# Altium PCB EEG_PCB.PcbDoc (part 2 of 2)
Units mm, origin at the board's own origin, x right, y up, seen from the top; angles counter-clockwise.
Board outline 44 x 34 mm, 4 copper layers (Top Layer, Internal Plane 1, Internal Plane 2, Bottom Layer), stack 0.778 mm thick; 60 components, 61 nets, 284 pads, 106 vias.
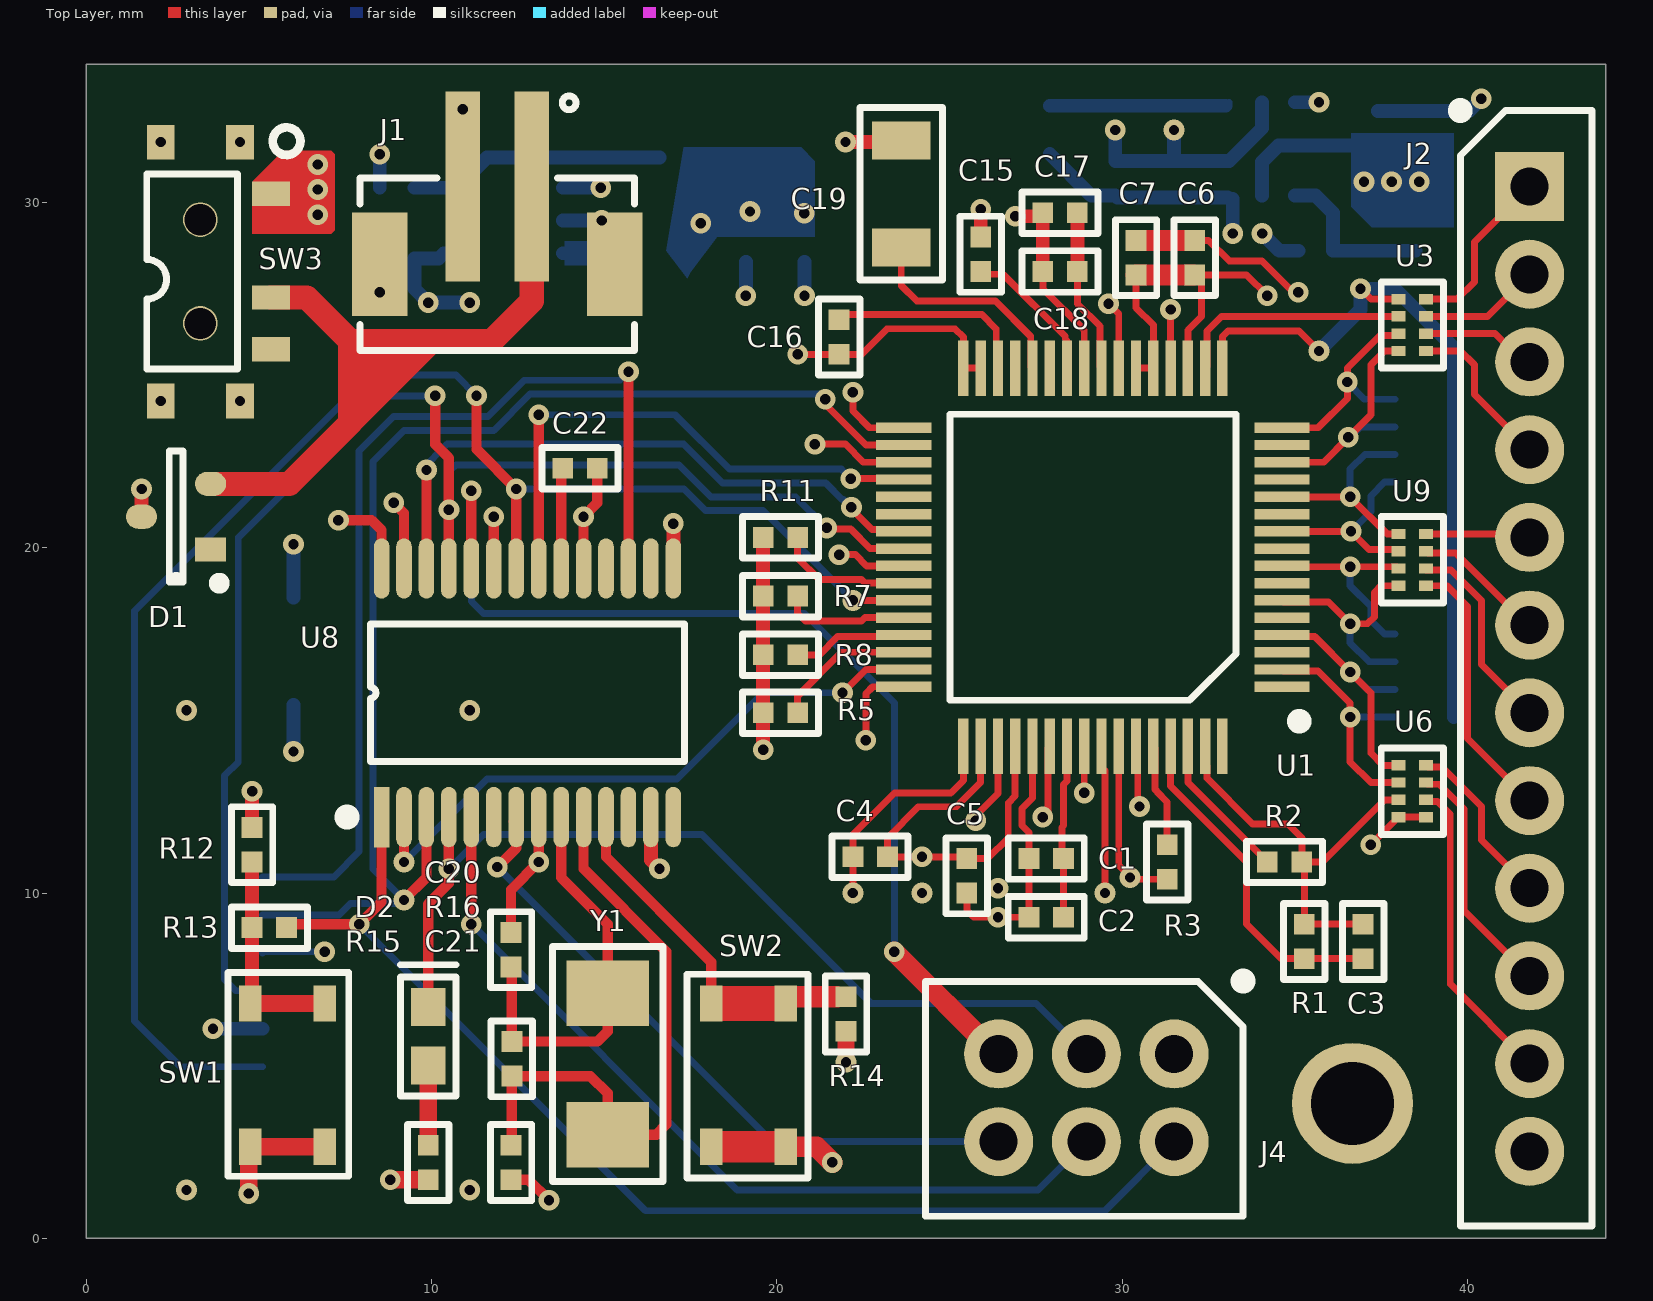
[diagram p0: Top Layer view]

## Part data (continued)
U1: library part ADS1299IPAGR, "IC AFE 24BIT 16KSPS LN 64TQFP", Case/Package=TQFP, Manufacturer="Texas Instruments", Max Operating Temperature=85°C, Max Power Dissipation=42mW, Max Supply Voltage=5.25V, Min Operating Temperature=-40°C, Operating Supply Current=7.14mA, Package Quantity=1, Power Consumption=41mW, Supplier Part Number 1=296-34818-6-ND, Category="Data Acquisition - Analog Front End (AFE)", ComponentLink1Description=http://www.ti.com/lit/ds/symlink/ads1299.pdf?src-supplier=Digi-Key, ComponentLink1URL=http://www.ti.com/lit/ds/symlink/ads1299.pdf?src-supplier=Digi-Key, ComponentLink2Description=http://www.ti.com/general/docs/lit/getliterature.tsp?genericPartNumber=ADS1299&&fileType=pdf&src-supplier=Avnet, ComponentLink2URL=http://www.ti.com/general/docs/lit/getliterature.tsp?genericPartNumber=ADS1299&&fileType=pdf&src-supplier=Avnet, ComponentLink3Description=https://www.verical.com/server-webapp/html/getDatasheet?partID=681922&src-supplier=Verical, ComponentLink3URL=https://www.verical.com/server-webapp/html/getDatasheet?partID=681922&src-supplier=Verical, ComponentLink4Description=http://www.ti.com/litv/sbas499a?src-supplier=Mouser, ComponentLink4URL=http://www.ti.com/litv/sbas499a?src-supplier=Mouser, ComponentLink5Description=http://www.produktinfo.conrad.com/datenblaetter/1100000-1199999/001186463-da-01-en-IC_AFE_24BIT_16_ADS1299IPAGR_TQFP_64_TID.pdf?src-supplier=Conrad, ComponentLink5URL=http://www.produktinfo.conrad.com/datenblaetter/1100000-1199999/001186463-da-01-en-IC_AFE_24BIT_16_ADS1299IPAGR_TQFP_64_TID.pdf?src-supplier=Conrad, Contact Plating=Gold, Conversion Rate=16KS/s, Interface=SPI, Lead Free="Lead Free", Manufacturer Part Number=ADS1299IPAGR, Number of A/D Converters=8, Number of Bits=24, Number of Channels=8, Number of Converters=8, Number of Inputs=8, Number of Pins=64, Packaging="Tape and Reel", Pricing 1="1=53.84, 10=50.577, 100=44.051 (USD)", Radiation Hardening=No, Resolution=24b, Sampling Rate=16KS/s, Signal to Noise Ratio (SNR)=121dB, Stock 1=1589, Supplier 1=Digi-Key, Type="General Purpose"
U2: library part AP3417CKTR-G1, "IC REG BUCK ADJ 1A SYNC SOT25", Case/Package=SOT-23-5, Manufacturer=Diodes, Max Input Voltage=5.5V, Max Operating Temperature=85°C, Max Output Current=1A, Max Output Voltage=4.95V, Min Input Voltage=2.5V, Min Operating Temperature=-40°C, Min Output Voltage=600mV, Operating Supply Current=220uA, Output Voltage=5V, Package Quantity=3000, Supplier Part Number 1=AP3417CKTR-G1DIDKR-ND, Switching Frequency=1.5MHz, ComponentLink1Description=https://www.diodes.com/assets/Datasheets/AP3417C.pdf?src-supplier=Digi-Key, ComponentLink1URL=https://www.diodes.com/assets/Datasheets/AP3417C.pdf?src-supplier=Digi-Key, ComponentLink2Description=http://www.diodes.com/datasheets/AP3417C.pdf?src-supplier=Avnet, ComponentLink2URL=http://www.diodes.com/datasheets/AP3417C.pdf?src-supplier=Avnet, Efficiency=94%, Height=1.3mm, Lead Free="Lead Free", Length=3.1mm, Manufacturer Part Number=AP3417CKTR-G1, Min Supply Voltage=2.5V, Mount="Surface Mount", Number of Outputs=1, Number of Pins=5, Operating Supply Voltage=5.5V, Output Configuration=Positive, Output Current=1A, Output Type=Adjustable, Packaging="Tape and Reel", Pricing 1="1=0.41, 10=0.351, 100=0.2621, 500=0.20592, 1000=0.15912 (USD)", Stock 1=30373, Supplier 1=Digi-Key, Synchronous Rectifier=Yes, Weight=0.001058oz, Width=1.7mm
U3 U6 U9: library part EXB-N8V162JX, Case/Package=0402, Manufacturer=Panasonic, Max Operating Temperature=125°C, Min Operating Temperature=-55°C, Number of Resistors=4, Package Quantity=1, Power Per Element=31mW, Resistance=1.6kR, Supplier Part Number 1=Y10162DKR-ND, Temperature Coefficient=200ppm/°C, Tolerance=5%, Voltage Rating=50V, Voltage Rating (DC)=100V, Circuit Type=Isolated, ComponentLink1Description=http://www.mouser.com/ds/2/315/AOC0000CE1-49292.pdf?src-supplier=Mouser, ComponentLink1URL=http://www.mouser.com/ds/2/315/AOC0000CE1-49292.pdf?src-supplier=Mouser, ComponentLink2Description=http://industrial.panasonic.com/www-data/pdf/AOC0000/AOC0000CE1.pdf?src-supplier=Avnet, ComponentLink2URL=http://industrial.panasonic.com/www-data/pdf/AOC0000/AOC0000CE1.pdf?src-supplier=Avnet, ComponentLink3Description=http://www.onlinecomponents.com/datasheet/exb-n8v162jx.aspx?p=44463680&src-supplier=Onlinecomponents.com, ComponentLink3URL=http://www.onlinecomponents.com/datasheet/exb-n8v162jx.aspx?p=44463680&src-supplier=Onlinecomponents.com, ComponentLink4Description=https://industrial.panasonic.com/cdbs/www-data/pdf/AOC0000/AOC0000C14.pdf?src-supplier=Digi-Key, ComponentLink4URL=https://industrial.panasonic.com/cdbs/www-data/pdf/AOC0000/AOC0000C14.pdf?src-supplier=Digi-Key, Height=0.022inch, Lead Free="Contains Lead", Length=0.079inch, Manufacturer Part Number=EXB-N8V162JX, Mount="Surface Mount", Number of Contacts=8, Number of Pins=8, Number of Terminals=8, Packaging="Tape and Reel", Pricing 1="1=0.11, 10=0.094, 25=0.0652, 50=0.0508, 100=0.0363, 250=0.02832, 500=0.0225, 1000=0.01597, 5000=0.01234 (USD)", Radiation Hardening=No, Stock 1=21369, Supplier 1=Digi-Key, Terminal Pitch=0.5mm, Termination=SMD/SMT, Width=1mm
U4: library part TPS61073DDCR, "IC REG BOOST ADJ 0.5A SYNC SOT6", Case/Package=SOT-23-6, Frequency=1.2MHz, Manufacturer="Texas Instruments", Max Input Voltage=5.5V, Max Operating Temperature=85°C, Max Output Current=150mA, Min Input Voltage=900mV, Min Operating Temperature=-40°C, Min Output Voltage=2.3V, Package Quantity=1, Quiescent Current=19uA, Supplier Part Number 1=296-21898-2-ND, Category="PMIC - Voltage Regulators - DC DC Switching Regulators", ComponentLink1Description=http://focus.ti.com/lit/ds/symlink/tps61070.pdf?src-supplier=Element14, ComponentLink1URL=http://focus.ti.com/lit/ds/symlink/tps61070.pdf?src-supplier=Element14, ComponentLink2Description=http://www.ti.com/lit/ds/symlink/tps61073.pdf?src-supplier=Digi-Key, ComponentLink2URL=http://www.ti.com/lit/ds/symlink/tps61073.pdf?src-supplier=Digi-Key, Efficiency=90%, Lead Free="Lead Free", Manufacturer Part Number=TPS61073DDCR, Max Output Voltage=5.5V, Max Supply Voltage=5.5V, Min Supply Voltage=2.3V, Mount="Surface Mount", Number of Outputs=1, Number of Pins=6, Output Configuration=Positive, Output Current=150mA, Output Type=Adjustable, Output Voltage=5.5V, Packaging="Tape and Reel", Pricing 1="3000=0.52668, 6000=0.50688, 15000=0.49104 (USD)", REACH SVHC="No SVHC", Stock 1=6000, Supplier 1=Digi-Key, Switching Frequency=1.2MHz, Synchronous Rectifier=Yes, Termination=SMD/SMT, Topology=Boost, Weight=0.00127oz
U5 U7: library part CA0612KRX7R9BB102, "YAGEO (PHYCOMP)         CA0612KRX7R9BB102             Capacitor Array, C-Array, 1000 pF, 50 V,  10%, SMD, 4 Element", Capacitance=1nF, Case/Package=0612, Case Code (Metric)=1632, Dielectric=X7R, Dielectric Material=Ceramic, Insulation Resistance=10GR, Manufacturer=Yageo, Max Operating Temperature=125°C, Min Operating Temperature=-55°C, Number of Capacitors=4, Package Quantity=4000, Supplier Part Number 1=311-2073-6-ND, Tolerance=10%, Voltage=50V, Case Code (Imperial)=0612, Circuit Type=Isolated, ComponentLink1Description=https://www.verical.com/server-webapp/html/getDatasheet?partID=403419&src-supplier=Verical, ComponentLink1URL=https://www.verical.com/server-webapp/html/getDatasheet?partID=403419&src-supplier=Verical, ComponentLink2Description=http://www.yageo.com/documents/recent/UPY-4C-Array_16V-to-50V-3.pdf?src-supplier=Digi-Key, ComponentLink2URL=http://www.yageo.com/documents/recent/UPY-4C-Array_16V-to-50V-3.pdf?src-supplier=Digi-Key, ComponentLink3Description=http://www.farnell.com/datasheets/2167451.pdf?src-supplier=Element14, ComponentLink3URL=http://www.farnell.com/datasheets/2167451.pdf?src-supplier=Element14, ComponentLink4Description=http://www.yageo.com/documents/recent/UPY-4C-Array_16V-to-50V_4.pdf?src-supplier=Future+Electronics, ComponentLink4URL=http://www.yageo.com/documents/recent/UPY-4C-Array_16V-to-50V_4.pdf?src-supplier=Future+Electronics, Composition=Ceramic, Depth=3.2mm, Dissipation Factor=2.5%, Height=0.8mm, Height - Seated (Max)=0.035inch, Lead Free="Lead Free", Length=3.2mm, Manufacturer Part Number=CA0612KRX7R9BB102, Mount="Surface Mount", Number of Elements=4, Number of Terminals=8, Packaging="Tape and Reel", Pricing 1="1=0.41, 10=0.283, 100=0.1697, 500=0.12728, 1000=0.10749 (USD)", Radiation Hardening=No, REACH SVHC=Unknown, Stock 1=2369, Supplier 1=Digi-Key, Terminal Pitch=0.8mm, Termination=SMD/SMT, Voltage Rating=50V, Width=0.063inch
U8: library part PIC32MX250F128B-I/SS, "MICROCHIP - PIC32MX250F128B-I/SS - MCU, 32BIT, PIC32, 40MHZ, SSOP-28", Case/Package=SSOP, Frequency=40MHz, Manufacturer=Microchip, Max Operating Temperature=85°C, Max Supply Voltage=3.6V, Min Operating Temperature=-40°C, Min Supply Voltage=2.3V, Package Quantity=47, Supplier Part Number 1=PIC32MX250F128B-I/SS-ND, Address Bus Width=32b, ComponentLink1Description=https://www.distrelec.biz/Web/Downloads/_t/ds/PIC32MX1XX_2XX_eng_tds.pdf?mime=application%2Fpdf&src-supplier=Distrelec, ComponentLink1URL=https://www.distrelec.biz/Web/Downloads/_t/ds/PIC32MX1XX_2XX_eng_tds.pdf?mime=application%2Fpdf&src-supplier=Distrelec, ComponentLink2Description=http://uk.rs-online.com/webdocs/1385/0900766b8138557c.pdf?src-supplier=RSComponents, ComponentLink2URL=http://uk.rs-online.com/webdocs/1385/0900766b8138557c.pdf?src-supplier=RSComponents, ComponentLink3Description=http://www.microchip.com/mymicrochip/filehandler.aspx?ddocname=en556114&src-supplier=Digi-Key, ComponentLink3URL=http://www.microchip.com/mymicrochip/filehandler.aspx?ddocname=en556114&src-supplier=Digi-Key, ComponentLink4Description=http://ww1.microchip.com/downloads/en/DeviceDoc/61168D.pdf?src-supplier=Avnet, ComponentLink4URL=http://ww1.microchip.com/downloads/en/DeviceDoc/61168D.pdf?src-supplier=Avnet, ComponentLink5Description=http://www.farnell.com/datasheets/1538023.pdf?src-supplier=Element14, ComponentLink5URL=http://www.farnell.com/datasheets/1538023.pdf?src-supplier=Element14, Core Architecture=PIC, Data Bus Width=32b, Height=1.85mm, Interface=I2C,SPI,USB,IrDA,UART,USART,LIN,I2S, Lead Free="Lead Free", Length=10.5mm, Manufacturer Part Number=PIC32MX250F128B-I/SS, Max Frequency=40MHz, Memory Size=128KB, Memory Type=FLASH, Number of ADC Channels=10, Number of I2C Channels=2, Number of I/Os=19, Number of Pins=28, Number of Programmable I/O=19, Number of PWM Channels=5, Number of SPI Channels=2, Number of Timers/Counters=5, Number of UART Channels=2, Oscillator Type=Internal, Packaging=Rail/Tube, Peripherals="I2C,Brown-out Detect/Reset,POR,PWM,WDT,DMA", Pricing 1="1=3.57, 25=3.27, 100=2.96 (USD)", Radiation Hardening=No, RAM Size=32KB, REACH SVHC="No SVHC", Stock 1=861, Supplier 1=Digi-Key, Watchdog Timer=Yes, Width=5.6mm
Y1: "Crystal Oscillator", Case/Package=SMD/SMT, ESR (Equivalent Series Resistance)=100R, Frequency=8MHz, Frequency Stability=30ppm, Frequency Tolerance=20ppm, Load Capacitance=18pF, Manufacturer="ECS International", Manufacturer Part Number=ECS-80-18-30-JGN-TR, Max Operating Temperature=85°C, Min Operating Temperature=-40°C, Supplier Part Number 1=XC2103DKR-ND, ComponentLink1Description=http://www.mouser.com/ds/2/122/ecx-53r-17605.pdf?src-supplier=Mouser, ComponentLink1URL=http://www.mouser.com/ds/2/122/ecx-53r-17605.pdf?src-supplier=Mouser, ComponentLink2Description=http://www.ecsxtal.com/store/pdf/partnumber4.pdf?src-supplier=Digi-Key, ComponentLink2URL=http://www.ecsxtal.com/store/pdf/partnumber4.pdf?src-supplier=Digi-Key, ComponentLink3Description=http://www.ecsxtal.com/store/pdf/ecx-53r.pdf?src-supplier=Digi-Key, ComponentLink3URL=http://www.ecsxtal.com/store/pdf/ecx-53r.pdf?src-supplier=Digi-Key, Height=0.055inch, LatestRevisionDate=17-Jul-2002, LatestRevisionNote="Re-released for DXP Platform.", Length=0.197inch, Mount="Surface Mount", PackageDescription="Crystal, Thru-Hole; 2 Leads; Body 3.1 x 8.2 mm (Dia.xH)", PackageReference=R38, Packaging="Tape and Reel", Pricing 1="1=0.69, 10=0.607, 50=0.5676, 100=0.5016, 500=0.4752 (USD)", Published=8-Jun-2000, Publisher="Altium Limited", Stock 1=5339, Supplier 1=Digi-Key, Width=0.126inch

## Free pads (board coordinates)
  round 3.5 hole 2.4: 1(36.67,3.91)

## Via types
v1: diameter 0.6, hole 0.3, Top Layer to Bottom Layer, tented both sides, 106 vias

## Nets (pads, with @x,y where several pads share a name; then routed paths per layer and width w, separated by ;. In a path a pad name is that pad's centre, name@x,y a point inside that pad or via, vN(x,y) a via of type N, cw(c..) or ccw(c..) an arc to the next point about the centre after c; other vN are vias at no path point)
1P: J2.3 U3.6 | length 3.3
  Top Layer w0.2: U3.6 40.8,26.2 41.2,25.8 41.38,25.8 J2.3
2P: J2.4 U3.5 | length 4.7
  Top Layer w0.2: U3.5 39.8,25.7 40.2,25.3 40.2,24.44 J2.4
3P: J2.5 U9.8 | length 3
  Top Layer w0.2: U9.8 41.7,20.4 J2.5
3V3: C4.2 C5.2 C9.2 C10.2 C23.2 J3.4 J4.1 L1.2 R4.2 R12.2 SW2.1 SW2.2 U1.35 U1.48 U1.50 U1.52 U8.13 U8.15 U8.23 U8.28 | length 29.6
  Top Layer w0.2: v1(21.1,23) 21.986,23 22.511,22.475 U1.35 ; v1(22.575,14.425) 22.575,15.775 22.775,15.975 U1.48 ; U1.50 25.9,13.2 25.2,12.5 24.1,12.5 23.2,11.6 C4.2 v1(24.2,11.05) 25.45,11.05 C5.2 26.1,11 26.7,11.6 26.7,12.614 26.9,12.814 U1.52
  Top Layer w0.3: v1(7.3,20.8) 8.26,20.8 8.55,20.51 U8.28 ; U8.23 v1(11.8,20.9)
  Top Layer w0.4: R12.2 v1(4.8,12.95) ; U8.13 16.35,10.95 v1(16.6,10.7) ; U8.15 v1(17,20.7)
  Top Layer w0.6: SW2.2 21.15,2.65 v1(21.6,2.2)
  Bottom Layer w0.2: J3.4 5.13,8.3 v1(6.9,8.3)
  Bottom Layer w0.4: C23.2 v1(6,20.1)
  other v1: 24.2,10 17.79,29.4 20.79,29.69 19.22,29.74
4P: J2.6 U9.7 | length 4.1
  Top Layer w0.2: U9.7 38.85,19.85 39.65,19.85 41.36,18.14 41.36,17.76 J2.6
5P: J2.7 U9.6 | length 5.8
  Top Layer w0.2: U9.6 38.8,19.35 39.525,19.35 40.4,18.475 40.4,16.62 J2.7
5V: C6.2 C7.2 C13.2 C14.2 R9.2 U1.19 U1.21 U1.22 U1.54 U1.56 U1.59 U4.5 | length 20
  Top Layer w0.2: v1(27.7,12.2) 27.85,12.35 27.85,14.2 U1.54 ; v1(28.9,12.9) 28.9,14.15 28.85,14.2 U1.56 ; U1.59 30.45,14.2 30.45,12.556 v1(30.5,12.506) ; U1.22 U1.21 30.9,26.45 30.4,26.95 C7.2 ; U1.19 31.9,26.3 32.3,26.7 32.3,27.9 33.6,27.9 v1(34.2,27.3) ; C6.2@32.06,27.9 32.08,27.92 C6.2
  Top Layer w0.6: C7.2 C6.2@32.06,27.9
  Bottom Layer w0.4: U4.5 34.05,31.173 34.523,31.646 C13.2
  other v1: 37,30.6 37.8,30.6 38.6,30.6
6P: J2.8 U9.5 | length 7.8
  Top Layer w0.2: U9.5 39.4,18.9 40,18.3 40,14.48 J2.8
7P: J2.9 U6.8 | length 5
  Top Layer w0.2: U6.8 38.85,13.65 39.256,13.65 40.4,12.506 40.4,11.54 J2.9
8P: J2.10 U6.7 | length 7
  Top Layer w0.2: U6.7 38.85,13.15 39.19,13.15 39.9,12.44 39.9,9.5 J2.10
/MCLR: J4.2 R13.1 U8.1 | length 33.5
  Top Layer w0.2: R13.1@5.7,9 R13.1@5.8,9.1
  Top Layer w0.3: R13.1@5.8,9.1 v1(7.9,9.1) 8.55,9.75 U8.1
  Bottom Layer w0.2: v1(7.9,9.1) 16.2,0.8 29.5,0.8 J4.2
ADS_GPIO_1: R11.2 U1.42 | length 4
  Top Layer w0.2: R11.2 20.6,19.7 21.225,19.075 22.449,19.075 22.549,18.975 U1.42
ADS_GPIO_2: R7.1 U1.44 | length 3.7
  Top Layer w0.2: R7.1 20.6,18.1 20.825,17.875 22.449,17.875 22.549,17.975 U1.44
ADS_GPIO_3: R8.1 U1.45 | length 3.3
  Top Layer w0.2: R8.1 21.234,16.9 21.759,17.425 23.625,17.425 U1.45
ADS_GPIO_4: R5.1 U1.46 | length 4.1
  Top Layer w0.2: R5.1 20.6,15.7 21.875,16.975 U1.46
ADS_VCAP1: C19.2 U1.28 | length 6.4
  Top Layer w0.2: C19.2 23.6,27.6 24.05,27.15 26.324,27.15 27.35,26.124 27.35,25.25 U1.28
ADS_VCAP2: C16.2 U1.30 | length 5.9
  Top Layer w0.2: C16.2 21.95,26.75 25.941,26.75 26.35,26.341 26.35,25.25 U1.30
ADS_VCAP3: C1.2 C2.2 U1.55 | length 5
  Top Layer w0.2: C2.2 C1.2 28.25,11.05 28.25,11.901 28.3,11.951 28.3,12.449 28.3,13.149 28.4,13.249 U1.55
ADS_VCAP4: C15.2 U1.26 | length 4.2
  Top Layer w0.2: C15.2 25.98,27.92 26.554,27.92 28.35,26.124 28.35,26.041 28.4,25.991 U1.26
ADS_VREFP: C17.1 C18.1 U1.24 | length 4.8
  Top Layer w0.2: C18.1 28.7,27.066 29.35,26.416 29.35,25.25 U1.24
  Top Layer w0.4: C18.1 C17.1
BIAS: J2.11 U6.6 | length 9
  Top Layer w0.2: U6.6 38.85,12.65 39.124,12.65 39.5,12.274 39.5,7.36 J2.11
BIAS_DRV: C3.2 R1.2 R2.2 U1.63 U6.3 | length 12.2
  Top Layer w0.2: U1.63 32.4,13.724 32.45,13.674 32.45,13.326 33.776,12 34.8,12 35.2,11.6 R2.2 ; C3.2 R1.2 35.275,10.825 R2.2 ; U6.3 37.6,12.7 35.8,10.9 R2.2
BIAS_IN: R2.1 U1.62 | length 4.3
  Top Layer w0.2: U1.62 31.9,13.2 R2.1
BIAS_INV: C3.1 R1.1 U1.61 | length 9.9
  Top Layer w0.2: U1.61 31.4,13.1 33.6,10.9 33.6,9.1 34.6,8.1 R1.1 C3.1
BIAS_REF: R3.1 U1.60 | length 3
  Top Layer w0.2: U1.60 30.95,14.2 30.95,12.999 31,12.949 31,12.934 31.3,12.634 R3.1
BOOST_FB: R9.1 R10.2 U4.4 | length 4.8
  Bottom Layer w0.4: U4.4 35.6,30.2 36.1,29.7 R10.2 R9.1
BOOST_SW: L2.2 U4.1 | length 5.2
  Bottom Layer w0.2: U4.1@33,32.8 U4.1
  Bottom Layer w0.4: L2.2 U4.1@33,32.8
BOOT_EN: R14.2 SW2.3 SW2.4 U8.11 | length 6.9
  Top Layer w0.2: R14.2@21.8,6.8 R14.2
  Top Layer w0.3: U8.11 15.05,11.05 18.1,8 SW2.4
BUCK_FB: R4.1 R6.2 U2.5 | length 7.7
  Bottom Layer w0.4: R6.2 U2.5 11.2,30.9 11.6,31.3 R4.1
BUCK_LX: L1.1 U2.3 | length 2.5
  Bottom Layer w0.2: U2.3 U2.3@13.95,28.377 ; L1.1@15.5,28.377 L1.1
  Bottom Layer w0.4: U2.3 14.8,28.527 15.15,28.177 L1.1
CS1: U1.39 U8.26 | length 18.4
  Top Layer w0.2: v1(22.156,21.175) 22.156,21.119 22.75,20.525 23.625,20.525 U1.39
  Top Layer w0.3: U8.26 v1(9.85,22.25)
  Bottom Layer w0.2: v1(9.85,22.25) 9.701,22.25 10.451,23 17.3,23 18.425,21.875 21.414,21.875 21.889,21.4 21.931,21.4 v1(22.156,21.175)
CS3: J3.2 U8.17 | length 29.2
  Top Layer w0.3: U8.17 v1(15.7,25.1)
  Bottom Layer w0.2: J3.2 7.17,10.47 7.9,11.2 7.9,22.8 8.9,23.8 11.634,23.8 12.686,24.851 15.451,24.851 v1(15.7,25.1)
DRDY: U1.47 U8.2 | length 18.1
  Top Layer w0.2: v1(21.9,15.8) 22.575,16.475 U1.47
  Top Layer w0.3: v1(9.2,10.9) U8.2
  Bottom Layer w0.2: v1(9.2,10.9) 11.6,13.3 17.1,13.3 19.6,15.8 v1(21.9,15.8)
GND: C1.1 C2.1 C4.1 C5.1 C6.1 C7.1 C8.1 C9.1 C10.1 C11.1 C12.1 C13.1 C14.1 C15.1 C16.1 C17.2 C18.2 C19.1 C20.1 C21.1 C22.1 C23.1 D1.3 J1.2 J1.3 J1.4 J2.12 J3.6 J3.9 J3.10 J3.11 J3.12 R3.2 R5.2 R6.1 R7.2 R8.2 R10.1 R11.1 R14.1 R15.1 SW1.3 SW1.4 SW3.4 SW3.5 SW3.6 SW3.7 U1.20 U1.23 U1.25 U1.31 U1.32 U1.33 U1.41 U1.49 U1.51 U1.53 U1.57 U1.58 U2.2 U4.2 U6.4 U6.5 U8.8 U8.19 U8.27 | length 98.4
  Top Layer w0.2: SW1.3@4.7,2.6 SW1.3 ; U8.27@9.075,19.525 U8.27 ; R15.1@9.8,1.6 R15.1 ; v1(20.6,25.6) C16.1 22.45,25.6 23.191,26.341 25.159,26.341 25.4,26.1 U1.32 U1.31 ; v1(21.8,19.8) 22.275,19.8 22.6,19.475 U1.41 ; v1(21.986,31.75) v1@22.036,31.8 ; v1(22.2,10) C4.1 22.2,11.7 23.4,12.9 25.034,12.9 25.4,13.266 U1.49 ; v1(22.2,24.5) 22.2,23.96 22.685,23.475 U1.33 ; C19.1@23.55,31.75 C19.1 ; C5.1 25.5,9.5 25.7,9.3 v1(26.4,9.3) C2.1 C1.1 27.3,11.751 27.1,11.952 27.1,12.449 27.4,12.749 U1.53 ; v1(25.76,12.1) 25.76,12.24 26.4,12.88 U1.51 U1.51@26.35,14.2 ; v1(26.9,29.6) v1@27,29.7 ; C17.2@27.6,29.6 C17.2 ; C18.2 27.7,27.5 28.9,26.3 U1.25 ; U1.57 29.4,13.65 29.5,13.55 v1(29.5,10) ; v1(29.6,27.066) 29.9,26.766 U1.23 U1.23@29.95,25.25 ; U1.58 29.9,10.8 30.225,10.475 v1(30.225,10.45) 30.275,10.4 R3.2 ; C7.1@30.4,28.92 C7.1@30.42,28.9 ; U1.20 v1(31.4,26.9) ; C6.1 32.5,28.9 33.1,28.3 34.049,28.3 34.949,27.4 v1(35.1,27.4) ; v1(37.2,11.4) U6.4 U6.5
  Top Layer w0.3: v1(8.9,21.3) 9.2,21 U8.27 ; C21.1 12.8,1.7 v1(13.4,1.1) ; C20.1 12.3,10.1 v1(13.1,10.9) U8.8 ; U8.19 v1(14.4,20.9) 14.8,21.3 C22.1
  Top Layer w0.4: D1.3 v1(1.6,21.7) ; v1(19.6,14.15) R5.2 R8.2 R7.2 R11.1 ; v1(21.986,31.75) C19.1@23.55,31.75 ; C15.1 v1(25.9,29.8) ; v1(26.9,29.6) C17.2@27.6,29.6 ; C18.2 C17.2
  Top Layer w0.5: v1(4.7,1.3) SW1.3@4.7,2.6 ; SW1.3 SW1.4 ; v1(8.8,1.7) R15.1@9.7,1.7 ; v1(22,5.1) R14.1
  Top Layer w0.6: C7.1@30.42,28.9 C6.1
  Bottom Layer w0.2: C12.1 C12.1@31.5,31.2
  Bottom Layer w0.4: v1(3.67,6.07) J3.6 ; v1(6,14.1) C23.1 ; v1(8.5,27.4) C8.1 ; R6.1 v1(8.5,31.4) ; U2.2 v1(14.923,29.477) ; v1(19.1,27.3) C10.1 ; v1(20.8,27.3) C9.1 ; v1(29.8,32.1) C11.1 C12.1@31.5,31.2 ; v1(31.5,32.1) C12.1@31.5,31.2 ; v1(34.05,29.1) 34.55,28.6 R10.1 ; U4.2 34.05,32.15 33.1,31.2 C12.1@31.5,31.2 ; C13.1 C14.1 40.046,32.646 v1(40.4,33)
  other v1: 2.9,1.4 11.1,1.4 26.4,10.14 2.9,15.29 11.1,15.29 2.15,24.25 4.45,24.25 2.15,31.75 4.45,31.75 10.9,32.7
IN1P: U1.16 U3.3 U5.8 | length 6.6
  Top Layer w0.2: U1.16 35.675,23.475 36.52,24.32 v1(36.52,24.8) 36.52,25.211 37.459,26.15 37.95,26.15 U3.3
  Bottom Layer w0.2: v1(36.52,24.8) 37.02,24.3 U5.8
IN2P: U1.14 U3.4 U5.7 | length 7
  Top Layer w0.2: U1.14 35.824,22.475 v1(36.549,23.2) 37.2,23.851 37.2,25.3 37.6,25.7 U3.4
  Bottom Layer w0.2: v1(36.549,23.2) 36.6,23.2 36.9,23.5 U5.7
IN3P: U1.12 U5.6 U9.1 | length 6.1
  Top Layer w0.2: U1.12 v1(36.6,21.475) 37.675,20.4 U9.1
  Bottom Layer w0.2: v1(36.6,21.475) 36.6,22.275 37.025,22.7 U5.6
IN4P: U1.10 U5.5 U9.2 | length 5.7
  Top Layer w0.2: U1.10 v1(36.625,20.475) 37.15,19.95 37.95,19.95 U9.2
  Bottom Layer w0.2: v1(36.625,20.475) 37.2,21.05 37.2,21.5 37.6,21.9 U5.5
IN5P: U1.8 U7.8 U9.3 | length 6.1
  Top Layer w0.2: U1.8 34.625,19.45 v1(36.6,19.45) 37.95,19.45 U9.3
  Bottom Layer w0.2: v1(36.6,19.45) 36.6,18.9 37.2,18.3 37.2,17.9 37.6,17.5 U7.8
IN6P: U1.6 U7.7 U9.4 | length 6.6
  Top Layer w0.2: U1.6 34.675,18.425 35.975,18.425 v1(36.6,17.8) 37.1,17.8 37.3,18 37.3,18.7 37.5,18.9 U9.4
  Bottom Layer w0.2: v1(36.6,17.8) 36.6,17.249 37.149,16.7 U7.7
IN7P: U1.4 U6.1 U7.6 | length 7.5
  Top Layer w0.2: U1.4 34.675,17.425 35.575,17.425 v1(36.6,16.4) 37.2,15.8 37.2,14.05 37.55,13.7 U6.1
  Bottom Layer w0.2: v1(36.6,16.4) 37.1,15.9 U7.6
IN8P: U1.2 U6.2 U7.5 | length 7
  Top Layer w0.2: U1.2 34.675,16.425 35.675,16.425 36.6,15.5 v1(36.6,15.1) 36.6,13.8 37.2,13.2 U6.2
  Bottom Layer w0.2: v1(36.6,15.1) U7.5
MCLR_SW: R12.1 R13.2 SW1.1 SW1.2 | length 6.5
  Top Layer w0.2: R13.2@4.7,9 R13.2@4.8,9.1 ; R12.1@4.7,10.8 R12.1 ; SW1.2 4.7,6.85 SW1.2@4.8,6.95
  Top Layer w0.4: SW1.2@4.8,6.95 R13.2 ; R13.2@4.8,9.1 R12.1
  Top Layer w0.5: SW1.2 SW1.1
MCU_VCAP: C22.2 U8.20 | length 2.9
  Top Layer w0.2: C22.2@13.75,22.25 C22.2
  Top Layer w0.3: U8.20 C22.2@13.75,22.25
MISO: J3.7 U1.43 U8.22 | length 47.4
  Top Layer w0.2: U8.22 12.4,19.45 U8.22@12.5,19.55 ; v1(12.45,21.7) v1@12.5,21.65 ; v1(22.2,18.475) U1.43
  Top Layer w0.3: v1(11.3,24.4) 11.3,22.85 v1@12.5,21.65 ; v1(12.45,21.7) 12.45,19.6 U8.22@12.5,19.55
  Bottom Layer w0.2: J3.7 2.73,4.97 1.4,6.3 1.4,18.175 8.225,25 10.7,25 v1(11.3,24.4) ; v1(12.45,21.7) 17.303,21.7 17.928,21.075 19.6,21.075 v1(22.2,18.475)
MOSI: J3.3 U1.34 U8.3 | length 36.9
  Top Layer w0.2: v1(21.4,24.3) 21.4,24.152 22.577,22.975 U1.34
  Top Layer w0.3: v1(9.2,9.8) 9.85,10.45 U8.3
  Bottom Layer w0.2: J3.3 7.321,9.37 7.651,9.7 9.1,9.7 v1(9.2,9.8) 8.3,10.7 8.3,22.5 9.2,23.4 11.8,23.4 12.851,24.451 21.248,24.451 v1(21.4,24.3)
OSC1: C20.2 R16.2 U8.9 Y1.1 | length 11.8
  Top Layer w0.2: C20.2 C20.2@12.325,7.835
  Top Layer w0.3: C20.2@12.325,7.835 R16.2 14.8,5.7 15.1,6 Y1.1 15.1,9.1 13.75,10.45 U8.9
OSC2: C21.2 R16.1 U8.10 Y1.2 | length 17.9
  Top Layer w0.2: C21.2 C21.2@12.325,2.725
  Top Layer w0.3: C21.2@12.325,2.725 R16.1 14.6,4.7 15.1,4.2 Y1.2 16.5,3 16.8,3.3 16.8,8.3 14.4,10.7 U8.10
PGD: D2.1 J4.3 U8.4 | length 27.3
  Top Layer w0.3: D2.1 9.9,9.684 10.5,10.284 v1(10.5,10.7) U8.4
  Bottom Layer w0.2: v1(10.5,10.7) 11.5,11.7 17.831,11.7 22.731,6.8 27.5,6.8 J4.3
PGD_LED: D2.2 R15.2 | length 2.3
  Top Layer w0.5: R15.2 D2.2
POC: J4.4 U8.5 | length 24.7
  Top Layer w0.3: v1(11.15,9.1) U8.5
  Bottom Layer w0.2: v1(11.15,9.1) 18.85,1.4 27.56,1.4 J4.4
RESET: U1.36 U8.21 | length 15.8
  Top Layer w0.2: v1(22.137,22) 23.65,22 U1.36
  Top Layer w0.3: U8.21 v1(13.1,23.851)
  Bottom Layer w0.2: v1(13.1,23.851) 17.049,23.851 18.625,22.275 21.869,22.275 21.869,22.269 v1(22.137,22)
RXD: J4.5 U8.24 | length 30.5
  Top Layer w0.2: U8.24@11.1,19.45 U8.24 ; v1(23.4,8.3) v1@23.4,8.36 ; J4.5@26.36,5.34 J4.5
  Top Layer w0.3: U8.24@11.1,19.45 11.15,19.5 v1(11.15,21.65)
  Top Layer w0.6: v1(23.4,8.3) J4.5@26.36,5.34
  Bottom Layer w0.2: v1(11.15,21.65) 11.15,18.45 11.5,18.1 20.8,18.1 23.4,15.5 v1(23.4,8.3)
SCLK: J3.5 U1.40 U8.25 | length 41.6
  Top Layer w0.2: v1(21.444,20.575) 21.481,20.538 22.137,20.538 22.7,19.975 U1.40
  Top Layer w0.3: v1(10.1,24.4) 10.1,23 10.5,22.6 v1(10.5,21.1) U8.25
  Bottom Layer w0.2: J3.5@4.6,7.17 4.33,7.17 4,7.5 4,13.4 4.4,13.8 4.4,20.3 8.5,24.4 v1(10.1,24.4) ; v1(10.5,21.1) 10.55,21.15 10.55,22.25 10.7,22.4 17.169,22.4 18.094,21.475 20.544,21.475 v1(21.444,20.575)
SRB1: U1.17 U3.1 U5.1 U5.2 U5.3 U5.4 U7.1 U7.2 U7.3 U7.4 | length 21.7
  Top Layer w0.2: U1.17 32.9,26.12 33.061,26.281 35.119,26.281 v1(35.7,25.7) ; v1(36.9,27.5) 37.2,27.2 U3.1
  Bottom Layer w0.4: v1(35.7,25.7) 36.9,26.9 v1(36.9,27.5) 37.9,27.5 39.6,25.8 U5.1 U5.2 U5.3 U5.4 U7.1 U7.2 U7.3 U7.4
SRB1out: J2.1 U3.8 | length 5
  Top Layer w0.2: U3.8 39.7,27.2 40.2,27.7 40.2,28.86 J2.1
SRB2: U1.18 U3.2 | length 6.8
  Top Layer w0.2: U1.18 32.45,25.25 32.45,26.281 32.869,26.7 U3.2
SRB2out: J2.2 U3.7 | length 3.5
  Top Layer w0.2: U3.7 40.58,26.7 J2.2
TXD: J4.6 U8.7 | length 19.7
  Top Layer w0.2: U8.7@12.325,12.075 U8.7
  Top Layer w0.3: v1(11.9,10.754) 12.45,11.304 U8.7
  Bottom Layer w0.2: v1(11.9,10.754) 19.854,2.8 J4.6
V_BATT: D1.2 J1.1 SW3.2 | length 19
  Top Layer w0.7: D1.2 5.875,21.85 7.641,23.616 7.641,25.991 ; SW3.2 6.382,27.25 7.641,25.991 ; J1.1 12.9,27.149 11.743,25.991 7.641,25.991
V_IN: C8.2 C11.2 C12.2 L2.1 SW3.1 U2.1 U2.4 U4.3 U4.6 | length 13.1
  Bottom Layer w0.2: C11.2 C11.2@29.854,30.146 ; U4.6@33.046,30.146 U4.6 U4.6@33.2,30.1
  Bottom Layer w0.4: v1(11.1,27.1) v1(9.9,27.1) 9.5,27.5 C8.2 10.2,28.377 10.35,28.527 U2.4 ; U2.1 v1(14.9,30.427) ; L2.1 29.1,30.2 C11.2 ; C11.2@29.854,30.146 C12.2 U4.6@33.046,30.146 ; v1(33.2,29.1) U4.6@33.2,30.1 ; U4.3 v1(35.7,32.9)
  other v1: 6.7,29.646 6.7,30.377 6.7,31.1
pads on no net: D1.1 J3.1 J3.8 SW3.3 SW3.8 SW3.9 U1.1 U1.3 U1.5 U1.7 U1.9 U1.11 U1.13 U1.15 U1.27 U1.29 U1.37 U1.38 U1.64 U8.6 U8.12 U8.14 U8.16 U8.18

## Polygon pours and split planes (outlines as drawn)
no net on Top Layer "Top Layer-No Net 1" (solid, pour order 6): 7.4,31.6
no net on Top Layer "Top Layer-No Net" (solid, pour order 0): 20.6,11.6
BUCK_LX on Bottom Layer "Bottom Layer-BUCK_LX" (solid, pour order 14): 16.8,27.775 16.8,30.6
BUCK_LX on Bottom Layer "Bottom Layer-BUCK_LX 1" (solid, pour order 12): 16.8,27.775
GND on Internal Plane 1 (split plane): 43.49,0.51 0.51,0.51 0.51,33.49 43.49,33.49
3V3 on Internal Plane 2 (split plane): 43.49,0.51 0.51,0.51 0.51,33.49 33.709,33.49 33.322,33.102 7.1,33.102 7.061,33.094 7.028,33.072 5.528,31.572 5.506,31.539 5.498,31.5 5.498,28.975 5.498,28.549 5.498,27.38 5.506,27.341 5.528,27.308 6.608,26.228 6.641,26.206 6.68,26.198 11.5,26.198 11.539,26.206 11.572,26.228 12.672,27.328 12.694,27.361 12.702,27.4 12.702,28.458 13.942,29.698 15.7,29.698 15.739,29.706 15.772,29.728 16.095,30.051 16.642,30.598 29.658,30.598 32.098,28.158 32.098,26.642 31.758,26.302 27.5,26.302 27.461,26.294 27.428,26.272 26.518,25.362 26.496,25.329 26.488,25.29 26.488,11.46 26.496,11.421 26.518,11.388 26.928,10.978 26.961,10.956 27,10.948 31.05,10.948 31.089,10.956 31.122,10.978 33.272,13.128 33.294,13.161 33.302,13.2 33.302,22.858 39.972,29.528 39.994,29.561 40.002,29.6 40.002,30.9 39.994,30.939 39.972,30.972 38.823,32.121 38.79,32.143 38.751,32.151 36.851,32.151 36.851,33.49 43.49,33.49
5V on Internal Plane 2 (split plane): 39.798,30.858 39.798,29.642 33.128,22.972 33.106,22.939 33.098,22.9 33.098,13.242 31.008,11.152 27.042,11.152 26.692,11.502 26.692,25.248 27.542,26.098 31.8,26.098 31.839,26.106 31.872,26.128 32.272,26.528 32.294,26.561 32.302,26.6 32.302,28.098 33.5,28.098 33.539,28.106 33.572,28.128 34.772,29.328 34.794,29.361 34.802,29.4 34.802,29.958 36.791,31.947 38.709,31.947
V_IN on Internal Plane 2 (split plane): 36.647,32.1 36.649,32.093 34.628,30.072 34.606,30.039 34.598,30 34.598,29.442 33.458,28.302 32.242,28.302 29.772,30.772 29.739,30.794 29.7,30.802 16.6,30.802 16.561,30.794 16.528,30.772 15.951,30.195 15.658,29.902 13.9,29.902 13.861,29.894 13.828,29.872 12.528,28.572 12.506,28.539 12.498,28.5 12.498,27.442 11.458,26.402 6.723,26.402 5.702,27.423 5.702,28.549 5.702,28.975 5.702,31.458 7.142,32.898 33.364,32.898 33.403,32.906 33.436,32.928 33.906,33.398 36.647,33.398

## Other copper
Top Layer:
  region net V_IN: 4.8,30.6 5.7,31.5 7.1,31.5 7.2,31.4 7.2,29.2 7.1,29.1 4.8,29.1
  region net 3V3: 18.4,3.1 20,3.1 20,2.2 18.4,2.2
  region net BOOT_EN: 21.8,7.3 21.8,6.7 20.5,6.7 20.5,7.3
  region: 20.5,7.3
  region net BOOT_EN: 18.4,7.3 18.4,6.3 20,6.3 20,7.3
  region net V_BATT: 7.641,25.991 7.641,23.141 10.491,25.991
Bottom Layer:
  region net BUCK_LX: 15.475,28.5 15.1,28.875 13.85,28.875 13.85,28.177 14.623,28.177 15.025,27.775 15.475,27.775
  pour cut-out: 13.8,27.2
  region net 3V3: 17.302,31.6 20.7,31.6 21.1,31.2 21.1,29 18.273,29 17.5,28 17.4,27.8 16.798,28.603
  region net 5V: 36.625,32 39.6,32 39.6,29.277 37.223,29.277 36.625,29.875
Internal Plane 2 (plane layer: these items are gaps in the copper):
  lines w0.1: 36.749,32.049 36.749,32.1
  lines w0.2: 36.749,32.1 36.749,33.5 33.864,33.5 33.364,33 16.7,33 14.7,33 12.7,33 7.1,33 5.6,31.5 5.6,28.975 5.6,28.549 5.6,27.38 6.68,26.3 11.5,26.3 12.6,27.4 12.6,28.5 13.9,29.8 15.7,29.8 16.023,30.123 16.6,30.7 29.7,30.7 32.2,28.2 ; 32.2,28.2 32.2,26.6 31.8,26.2 27.5,26.2 26.59,25.29 26.59,11.46 27,11.05 31.05,11.05 33.2,13.2 33.2,22.9 39.9,29.6 39.9,30.9 38.751,32.049 36.749,32.049 34.7,30 34.7,29.4 33.5,28.2 32.2,28.2

## Silkscreen, mask and mechanical layers (free items; w line width, h text height)
Bottom Overlay:
  text "Group 49 / SimPL Labs" at 33.24,17.23 h1.52
Board Outline:
  lines w0.1: 44,33 44,0 ; 44,0 44,34 ; 44,0 0,0 0,34 44,34 ; 44,0 44,34 ; 44,34 44,34